# Altium PCB Push function.PcbDoc
Units mm, origin at the board's own origin, x right, y up, seen from the top; angles counter-clockwise.
Board outline 152.4 x 101.6 mm, 2 copper layers (Top Layer, Bottom Layer); 5 components, 5 nets, 15 pads, 0 vias.
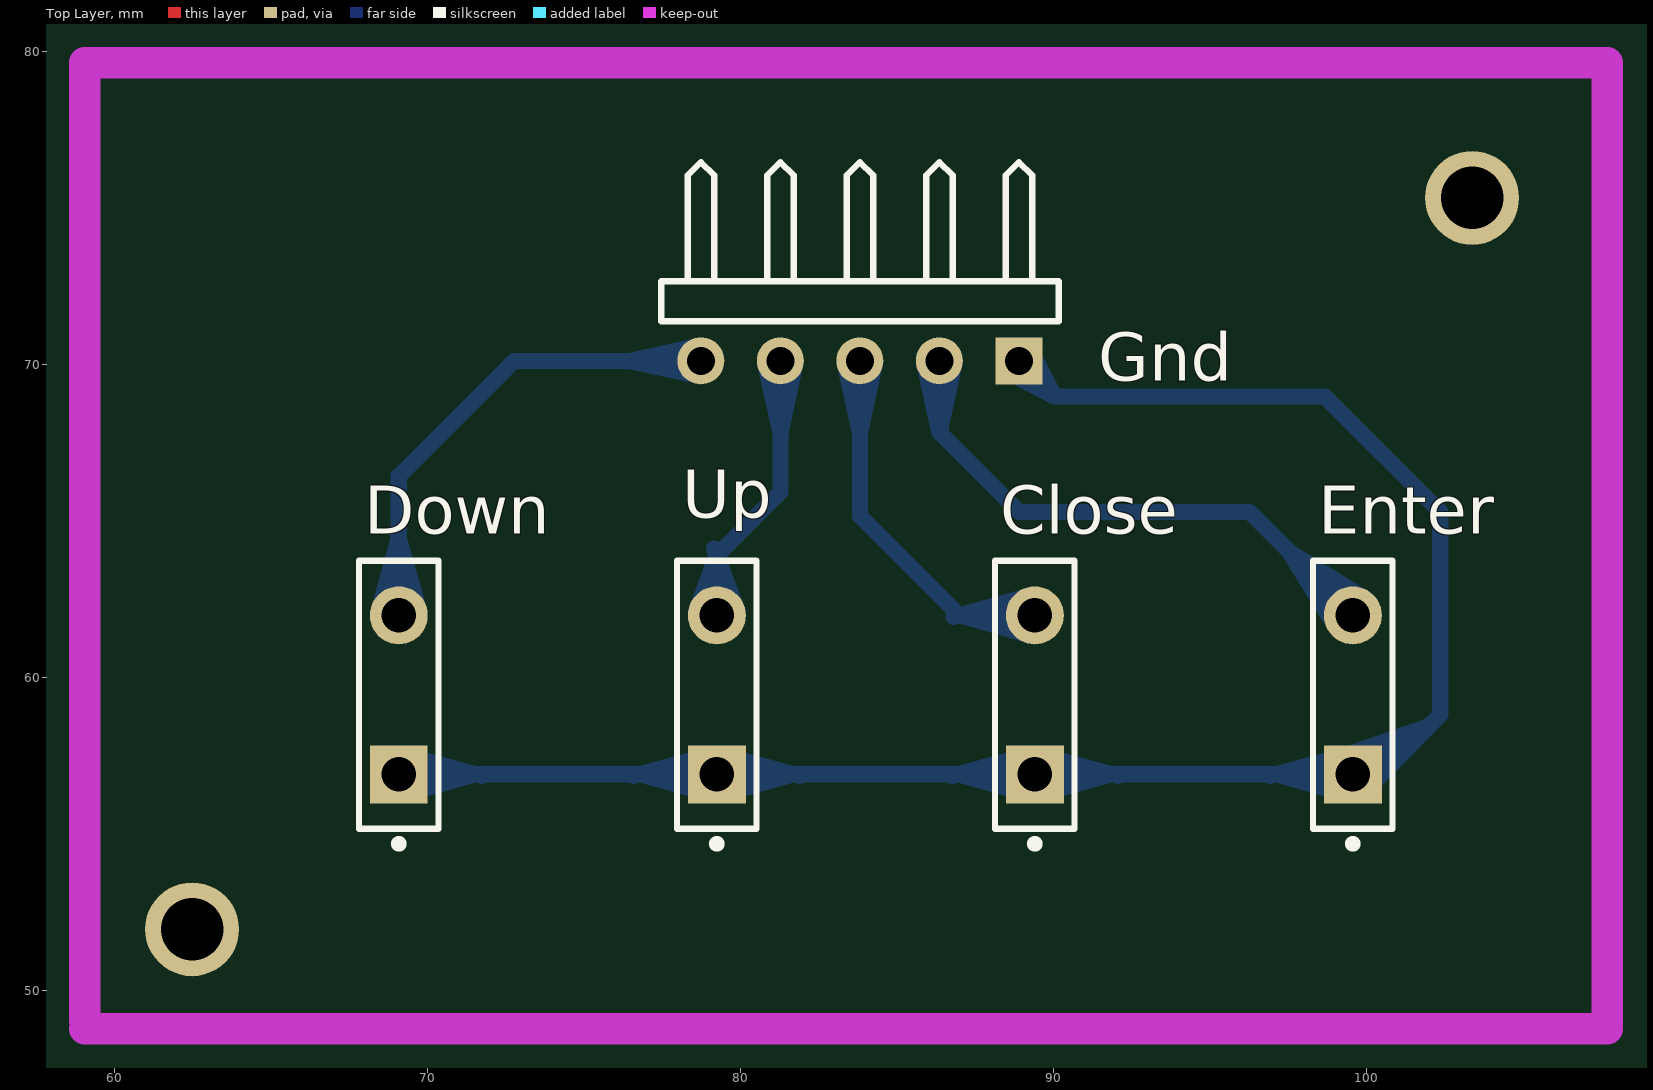
[diagram p0: Top Layer view]
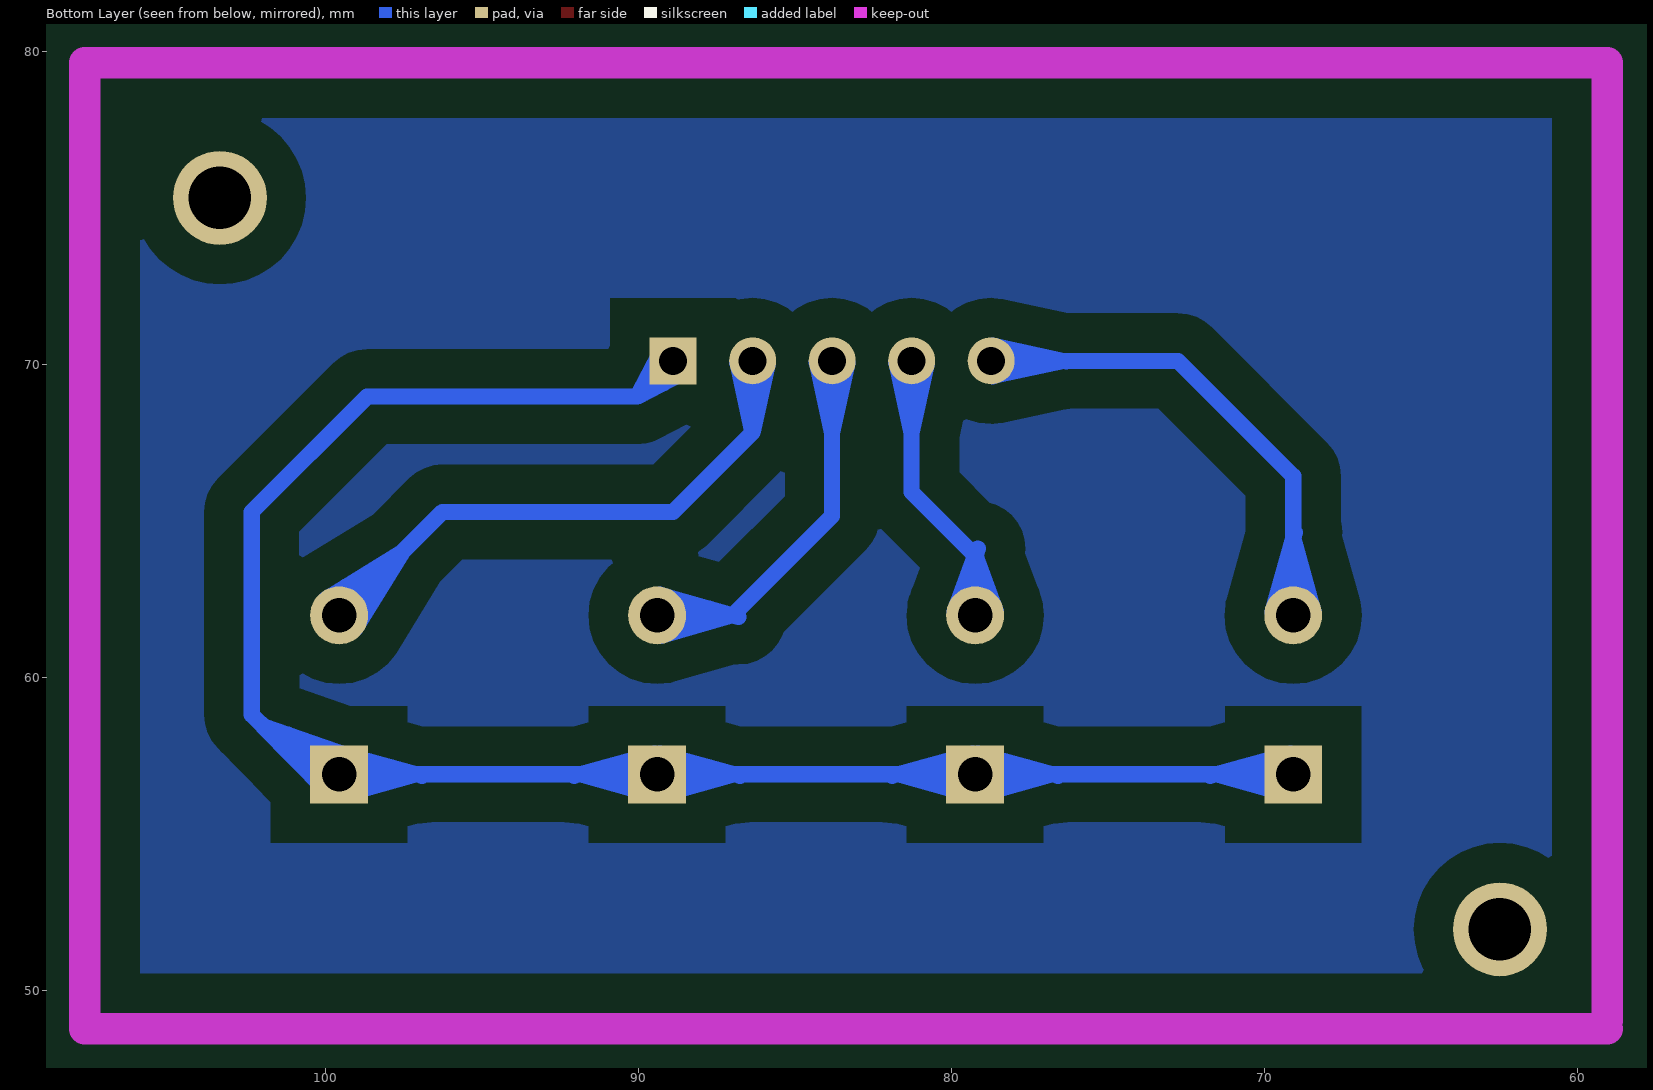
[diagram p1: Bottom Layer view, seen from below]

## Layer stack, top to bottom
Top Layer: signal copper 0.0356
Dielectric: dielectric 0.32, FR-4, Dk 4.8
Bottom Layer: signal copper 0.0356

## Board outline
25.4,25.4 177.8,25.4 177.8,127 25.4,127

## Design rules (kind name [scope] priority, off if disabled: settings)
Clearance [All] p1: gap=0.754
PolygonConnect [All] p1: connectstyle=Relief reliefconductorwidth=0.254 reliefentries=4 polygonreliefangle="90 Angle"
RoutingVias [All] p1: holewidth=0.711 width=1.27 viastyle="Through Hole" minholewidth=0.711 minwidth=1.27 maxholewidth=0.711 maxwidth=1.27
SilkscreenOverComponentPads [All] p1: minsilkscreentomaskgap=0.254
SolderMaskExpansion [All] p1: expansion=0.102
Width [All] p1: maxlimit=0.516 minlimit=0.516 preferedwidth=0.516
27 further rules are at their usual default settings.

## Components (designator, comment, footprint, x,y, rotation, side; value= is the part's Value field where it differs from the comment)
Close "SW-PB" SPST-2 89.408,59.436 r90 top
Down "SW-PB" SPST-2 69.088,59.436 r90 top
Enter "SW-PB" SPST-2 99.568,59.436 r90 top
Gnd "Header 5H" HDR1X5H 88.9,70.104 r180 top
Up "SW-PB" SPST-2 79.248,59.436 r90 top

## Footprints (in the part's own frame and the unit in brackets; to place one, negate y for a bottom-side part, rotate by r counter-clockwise, add the part's x,y. Pads: shape width x height; smd on the part's side, far side on the other; paste and mask are expansions set on the pad)
HDR1X5H [mm] "Connector; Header; 5 Position; Right Angle"
  rect 1.5x1.5 hole 0.9: 1(0,0)
  round 1.5 hole 0.9: 2(2.54,0) 3(5.08,0) 4(7.62,0) 5(10.16,0)
  silkscreen extent -1.27,-6.35 11.43,-1.27
SPST-2 [mm] "Circuit Breaker; 2 Leads"
  rect 1.85x1.85 hole 1.1: 1(-2.54,0)
  round 1.85 hole 1.1: 2(2.54,0)
  silkscreen extent -4.89,-1.27 4.28,1.27

## Part data
Close Down Enter Up: "Switch"
Gnd: "Header, 5-Pin, Right Angle"

## Free pads (board coordinates)
  round 3 hole 2: 0(103.378,75.311) 1(62.484,51.943)

## Nets (pads, with @x,y where several pads share a name; then routed paths per layer and width w, separated by ;. In a path a pad name is that pad's centre, name@x,y a point inside that pad or via, vN(x,y) a via of type N, cw(c..) or ccw(c..) an arc to the next point about the centre after c; other vN are vias at no path point)
GND: Close.1 Down.1 Enter.1 Gnd.1 Up.1 | length 157.2
  Bottom Layer w0.516: Down.1 Up.1 Close.1 Enter.1 ; Down.1@69.178,56.235 71.561,56.896 Down.1@69.178,57.557 ; Down.1@69.183,56.779 cw(c70.303,55.407) 70.777,57.114 ; Down.1@69.51,56.379 cw(c71.076,54.461) 71.738,56.847 ; Down.1@69.56,56.424 cw(c70.698,55.286) 70.698,56.896 cw(c70.698,58.506) Down.1@69.56,57.368 ; 76.598,56.847 cw(c77.26,54.461) Up.1@78.826,56.379 ; 77.559,57.114 cw(c78.033,55.407) Up.1@79.153,56.779 ; Up.1@78.776,56.424 ccw(c77.638,55.286) 77.638,56.896 ccw(c77.638,58.506) Up.1@78.776,57.368 ; Up.1@79.158,56.235 76.775,56.896 Up.1@79.158,57.557 ; Up.1@79.338,56.235 81.721,56.896 Up.1@79.338,57.557 ; Up.1@79.343,56.779 cw(c80.463,55.407) 80.937,57.114 ; Up.1@79.67,56.379 cw(c81.236,54.461) 81.898,56.847 ; Up.1@79.72,56.424 cw(c80.858,55.286) 80.858,56.896 cw(c80.858,58.506) Up.1@79.72,57.368 ; 86.758,56.847 cw(c87.42,54.461) Close.1@88.986,56.379 ; 87.719,57.114 cw(c88.193,55.407) Close.1@89.313,56.779 ; Gnd.1@88.609,69.707 90.043,68.961 ; Gnd.1@88.877,70.109 ccw(c89.518,69.974) Gnd.1@89.216,69.392 ; Gnd.1@88.9,69.612 cw(c88.9,68.424) 89.74,69.264 cw(c90.58,70.104) Gnd.1@89.392,70.104 ; Gnd.1 90.043,68.961 ; Gnd.1@88.907,70.127 cw(c88.425,68.599) 89.847,69.339 ; Close.1@88.936,56.424 ccw(c87.798,55.286) 87.798,56.896 ccw(c87.798,58.506) Close.1@88.936,57.368 ; Gnd.1@89.297,70.395 90.043,68.961 ; Close.1@89.318,56.235 86.935,56.896 Close.1@89.318,57.557 ; Gnd.1@89.381,70.002 ccw(c90.209,69.828) 89.818,69.078 ; Close.1@89.498,56.235 91.881,56.896 Close.1@89.498,57.557 ; Close.1@89.503,56.779 cw(c90.623,55.407) 91.097,57.114 ; Close.1@89.83,56.379 cw(c91.396,54.461) 92.058,56.847 ; Close.1@89.88,56.424 cw(c91.018,55.286) 91.018,56.896 cw(c91.018,58.506) Close.1@89.88,57.368 ; 96.918,56.847 cw(c97.58,54.461) Enter.1@99.146,56.379 ; 97.879,57.114 cw(c98.353,55.407) Enter.1@99.473,56.779 ; Enter.1@99.096,56.424 ccw(c97.958,55.286) 97.958,56.896 ccw(c97.958,58.506) Enter.1@99.096,57.368 ; Enter.1@99.24,57.056 cw(c100.482,56.452) Enter.1@100.03,57.757 ; Enter.1@99.278,57.497 101.998,58.437 ; Enter.1@99.478,56.235 97.095,56.896 Enter.1@99.478,57.557 ; Enter.1@99.568,57.047 ccw(c99.568,59.558) 101.343,57.782 ; Enter.1@99.568,57.563 ccw(c99.568,61.32) 102.224,58.663 ; Enter.1@99.581,57.046 ccw(c99.757,59.12) 101.246,57.666 ; Enter.1@99.624,57.561 ccw(c99.876,60.531) 102.009,58.449 ; Enter.1@99.704,56.83 cw(c102.066,55.682) 101.208,58.164 ; Enter.1@99.714,57.547 ccw(c100.065,59.118) 100.928,57.758 ccw(c101.79,56.399) Enter.1@100.219,56.75 ; Enter.1@99.988,56.378 101.998,58.437 ; 90.043,68.961 98.679,68.961 102.362,65.278 102.362,58.801 100.457,56.896 Enter.1 ; Enter.1 101.998,58.437
NetClose_2: Close.2 Gnd.3 | length 29.6
  Bottom Layer w0.516: Gnd.3@83.331,70.051 83.82,67.806 Gnd.3@84.309,70.051 ; Gnd.3@83.472,69.756 cw(c82.632,68.916) 83.82,68.916 cw(c85.008,68.916) Gnd.3@84.168,69.756 ; Gnd.3 83.82,65.151 86.995,61.976 ; 86.814,61.925 cw(c87.462,59.648) Close.2@88.98,61.464 ; 87.752,62.192 cw(c88.219,60.553) Close.2@89.311,61.86 ; Close.2@88.936,61.504 ccw(c87.798,60.366) 87.798,61.976 ccw(c87.798,63.586) Close.2@88.936,62.448 ; Close.2@89.316,61.315 86.995,61.976 ; Close.2@89.316,62.637 86.995,61.976 ; Close.2 86.995,61.976
NetDown_2: Down.2 Gnd.5 | length 37.1
  Bottom Layer w0.516: Down.2@68.427,62.066 69.088,64.449 Down.2@69.749,62.066 ; Down.2@68.571,62.398 ccw(c66.653,63.964) 69.039,64.626 ; Down.2@68.616,62.448 ccw(c67.478,63.586) 69.088,63.586 ccw(c70.698,63.586) Down.2@69.56,62.448 ; Down.2@68.971,62.071 ccw(c67.599,63.191) 69.306,63.665 ; Down.2 69.088,66.421 72.771,70.104 Gnd.5 ; 76.338,70.081 cw(c76.938,67.329) Gnd.5@78.472,69.691 ; 77.546,70.345 cw(c77.886,68.788) Gnd.5@78.753,70.124 ; Gnd.5@78.392,69.756 ccw(c77.552,68.916) 77.552,70.104 ccw(c77.552,71.292) Gnd.5@78.392,70.452 ; Gnd.5@78.687,69.615 76.442,70.104 Gnd.5@78.687,70.593
NetEnter_2: Enter.2 Gnd.2 | length 39.5
  Bottom Layer w0.516: Gnd.2@85.871,70.051 86.36,67.818 ; Gnd.2@86.012,69.756 cw(c85.172,68.916) 86.36,68.916 cw(c87.548,68.916) Gnd.2@86.708,69.756 ; Gnd.2 86.36,67.818 ; Gnd.2@86.849,70.051 86.36,67.818 ; 97.762,63.649 ccw(c99.561,64.755) Enter.2@99.566,62.643 ; 98.242,63.569 cw(c96.866,61.332) Enter.2@99.421,61.941 ; 98.244,62.865 ccw(c99.563,63.676) Enter.2@99.568,62.127 ; Enter.2@98.901,61.976 ccw(c97.291,61.976) 98.429,63.115 ccw(c99.568,64.253) Enter.2@99.568,62.643 ; Enter.2@99.045,61.563 97.548,63.996 Enter.2@99.981,62.499 ; 99.303,62.916 cw(c98.58,61.74) Enter.2@99.923,62.061 ; Enter.2 96.266,65.278 88.9,65.278 86.36,67.818
NetGnd_4: Gnd.4 Up.2 | length 25
  Bottom Layer w0.516: Up.2@78.591,62.093 79.248,63.881 ; Up.2@78.776,62.448 ccw(c77.638,63.586) 79.248,63.586 ccw(c80.858,63.586) Up.2@79.72,62.448 ; Up.2@78.785,62.456 ccw(c77.71,63.573) 79.165,64.107 ; Up.2@79.143,62.085 ccw(c78.309,62.95) 79.438,63.365 ; Up.2 79.248,63.881 ; Up.2@79.905,62.093 79.248,63.881 ; Gnd.4@80.791,70.051 81.28,67.806 Gnd.4@81.769,70.051 ; Gnd.4@80.932,69.756 cw(c80.092,68.916) 81.28,68.916 cw(c82.468,68.916) Gnd.4@81.628,69.756 ; Gnd.4 81.28,65.913 79.248,63.881

## Polygon pours and split planes (outlines as drawn)
no net on Bottom Layer "Bottom Layer-No Net" (solid, pour order 1000): 59.055,79.629 107.696,79.629 107.696,48.768 107.442,49.022 59.055,49.022

## Keep-outs
Keep-Out Layer:
  lines w1.016: 59.055,48.768 107.696,48.768 107.696,79.629 59.055,79.629 59.055,49.022 59.182,48.895